# EAGLE board bt-lights (EAGLE 6.1)
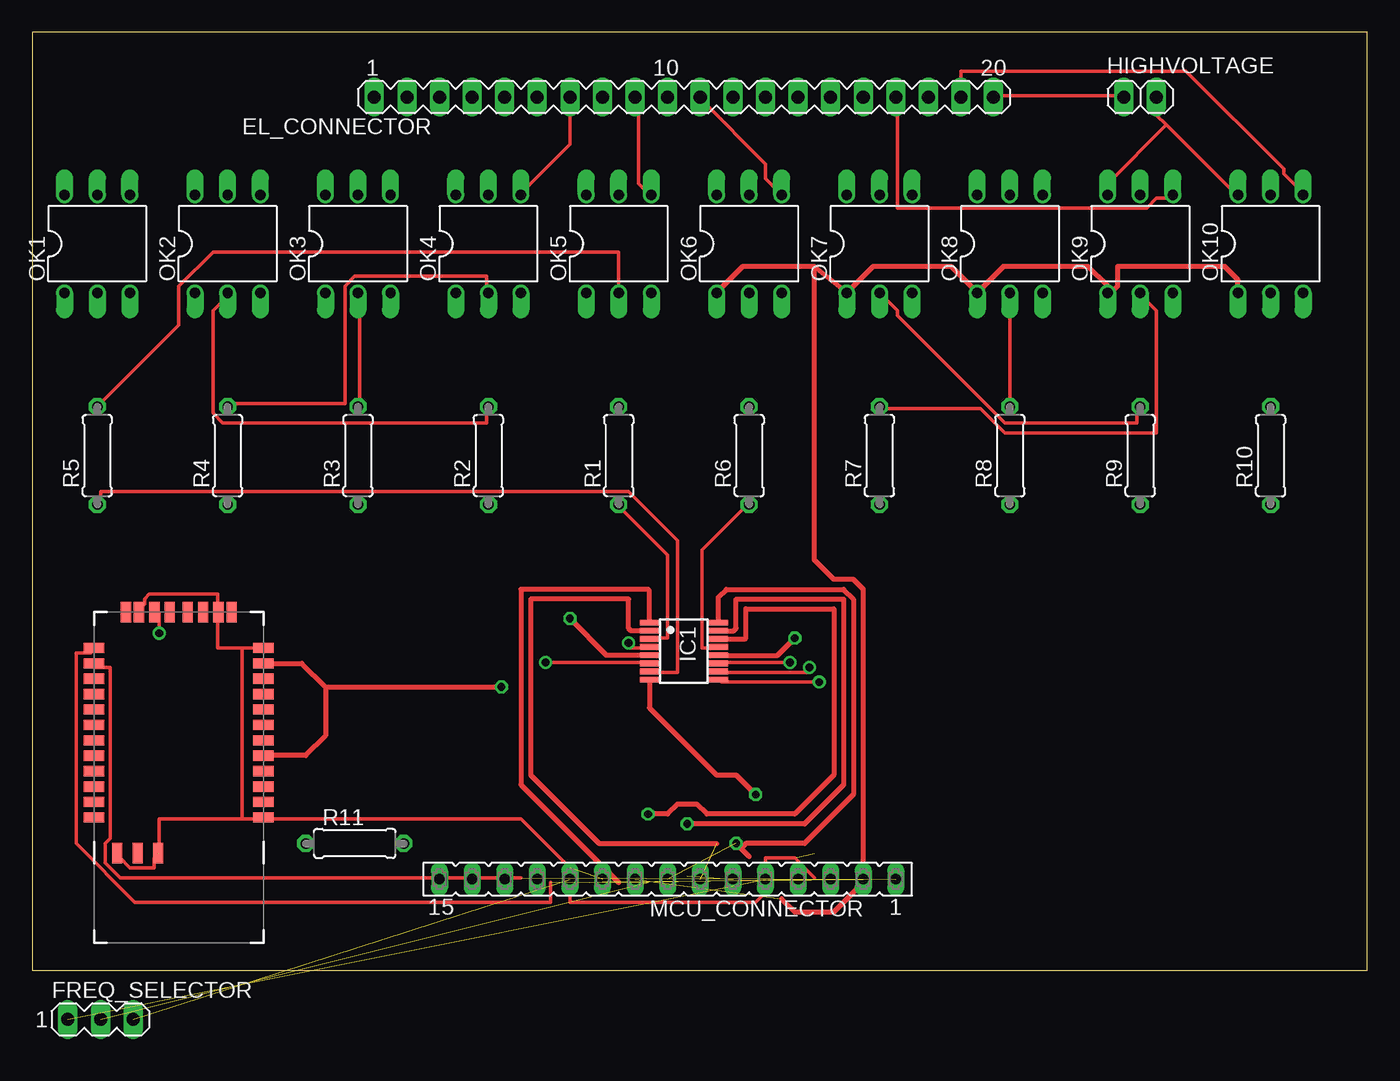
[diagram p0: board, top side]
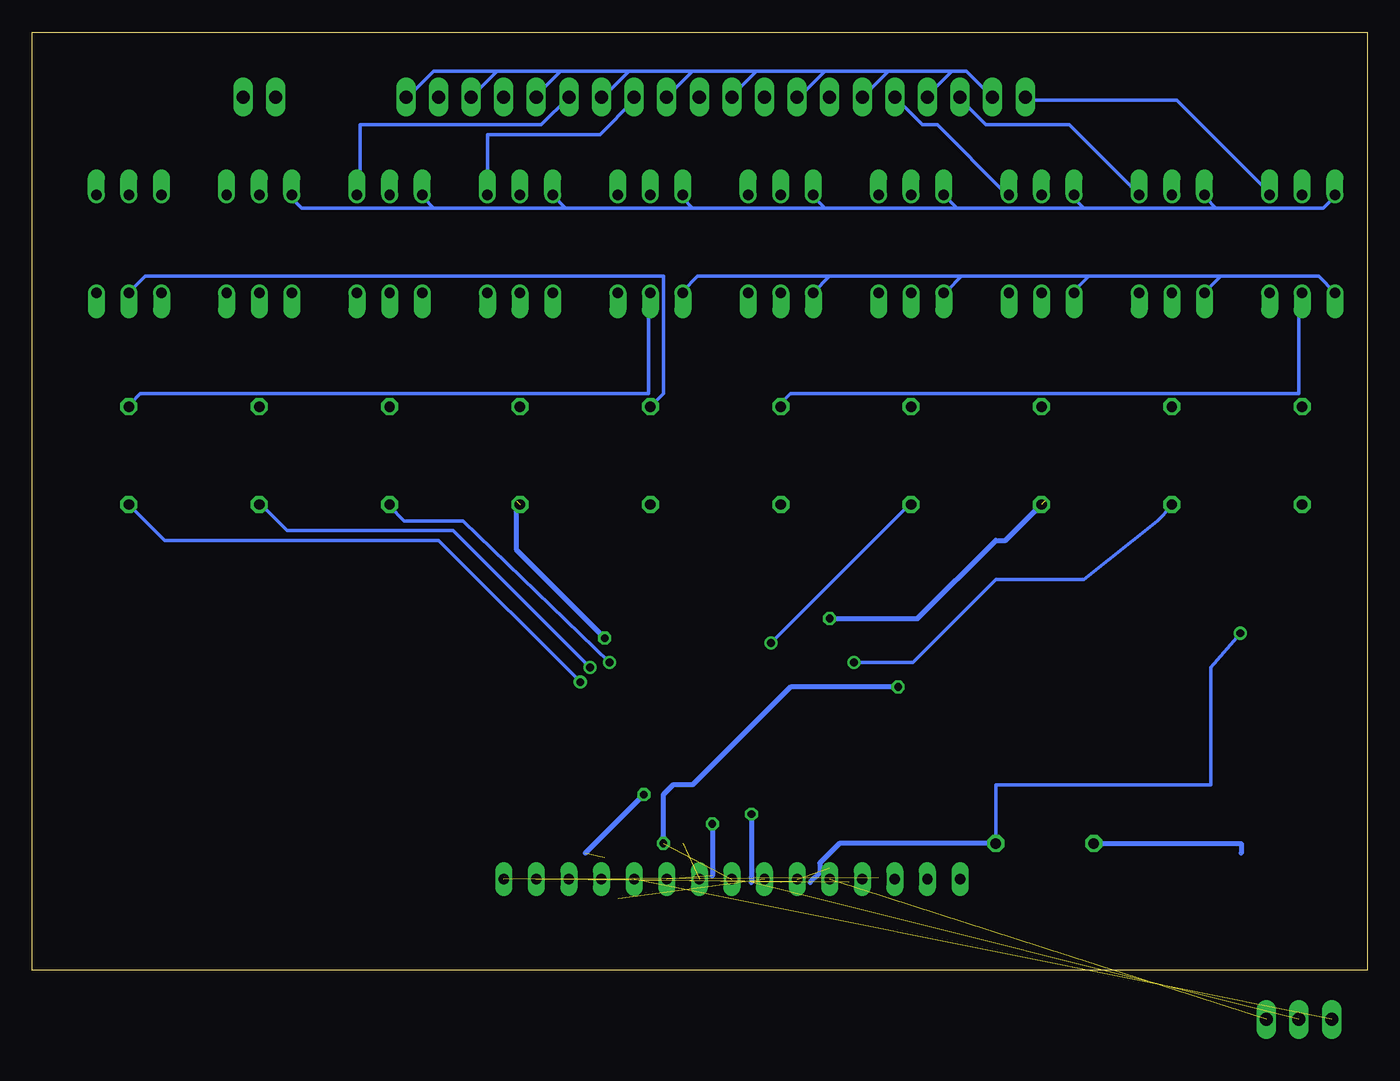
[diagram p1: board, bottom side, seen from below]

Size 104.06 x 73.14 mm. Coordinates in mm from the lower left corner, seen from the top.
Outline: 0,0 104.06,0 104.06,73.14 0,73.14 0,0
Copper layers (1*16): Top 0.035mm / dielectric 1.5mm / Bottom 0.035mm
Design rules: minimum track width 10mil, minimum drill 24mil, track to track 8mil, track to pad 8mil, pad to pad 8mil, via to via 8mil, smd to smd 8mil, copper to edge 40mil, drill to drill 8mil, minimum pad ring 10mil, minimum via ring 8mil, stop-mask expansion 4mil, vias tented up to drill 0mil, thermal gap 10mil

## Footprints (pad centres in the part's own frame; a part is rotated, then mirrored left to right if it is on the bottom)
RN41 = smd 0.8 x 1.6: 1 -6.6,-6.6; 2 -5.4,-6.6; 3 -4.2,-6.6; 4 -3,-6.6; 5 -1.8,-6.6; 6 -0.6,-6.6; 7 0.6,-6.6; 8 1.8,-6.6; 9 3,-6.6; 10 4.2,-6.6; 11 5.4,-6.6; 12 6.6,-6.6; 13 6.6,6.6; 14 5.4,6.6; 15 4.2,6.6; 16 3,6.6; 17 1.8,6.6; 18 0.6,6.6; 19 -0.6,6.6; 20 -1.8,6.6; 21 -3,6.6; 22 -4.2,6.6; 23 -5.4,6.6; 24 -6.6,6.6 | smd 1.6 x 0.8: 25 -9.4,4.8; 26 -9.4,3.2; 27 -9.4,1.6; 28 9.4,3.1; 29 9.4,-3.1; 30 9.4,-4.122; 31 9.4,-1.9; 32 9.4,-0.7; 33 9.4,0.7; 34 9.4,1.9; 35 9.4,4.122
MA20-1L = drill 1.016 long: 1 24.13,0; 2 21.59,0; 3 19.05,0; 4 16.51,0; 5 13.97,0; 6 11.43,0; 7 8.89,0; 8 6.35,0; 9 3.81,0; 10 1.27,0; 11 -1.27,0; 12 -3.81,0; 13 -6.35,0; 14 -8.89,0; 15 -11.43,0; 16 -13.97,0; 17 -16.51,0; 18 -19.05,0; 19 -21.59,0; 20 -24.13,0
MA03-1 = drill 1.016 long: 1 -2.54,0; 2 0,0; 3 2.54,0
1X02 = drill 1.016 long: 1 -1.27,0; 2 1.27,0
QSOP16 = smd 0.45 x 1.5: 1 -2.223,-2.69; 2 -1.587,-2.69; 3 -0.953,-2.69; 4 -0.318,-2.69; 5 0.318,-2.69; 6 0.953,-2.69; 7 1.587,-2.69; 8 2.223,-2.69; 9 2.223,2.69; 10 1.587,2.69; 11 0.953,2.69; 12 0.318,2.69; 13 -0.318,2.69; 14 -0.953,2.69; 15 -1.587,2.69; 16 -2.223,2.69
FE15 = drill 0.813 long: 1 -17.78,0; 2 -15.24,0; 3 -12.7,0; 4 -10.16,0; 5 -7.62,0; 6 -5.08,0; 7 -2.54,0; 8 0,0; 9 2.54,0; 10 5.08,0; 11 7.62,0; 12 10.16,0; 13 12.7,0; 14 15.24,0; 15 17.78,0
DIL06 = drill 0.813 offset: 1 -2.54,-3.81; 2 0,-3.81; 3 2.54,-3.81; 4 2.54,3.81; 5 0,3.81; 6 -2.54,3.81
0207/7 = drill 0.813 octagon: 1 -3.81,0; 2 3.81,0

## Placement (x,y rotation side)
BT_INTERFACE  BLUETOOTH-RN41"  [RN41]  11.43,18.54 90 top
EL_CONNECTOR  [MA20-1L]  50.8,68.07 180 top
FREQ_SELECTOR  [MA03-1]  5.33,-3.81 0 top  (outside the outline)
HIGHVOLTAGE  [1X02]  86.36,68.07 0 top
IC1  MAX6966  [QSOP16]  50.8,24.89 270 top
MCU_CONNECTOR  [FE15]  49.53,7.11 180 top
OK1  MOC3010M  [DIL06]  5.08,56.64 0 top
OK2  MOC3010M  [DIL06]  15.24,56.64 0 top
OK3  MOC3010M  [DIL06]  25.4,56.64 0 top
OK4  MOC3010M  [DIL06]  35.56,56.64 0 top
OK5  MOC3010M  [DIL06]  45.72,56.64 0 top
OK6  MOC3010M  [DIL06]  55.88,56.64 0 top
OK7  MOC3010M  [DIL06]  66.04,56.64 0 top
OK8  MOC3010M  [DIL06]  76.2,56.64 0 top
OK9  MOC3010M  [DIL06]  86.36,56.64 0 top
OK10  MOC3010M  [DIL06]  96.52,56.64 0 top
R1  1k  [0207/7]  45.72,40.13 90 top
R2  1k  [0207/7]  35.56,40.13 90 top
R3  1k  [0207/7]  25.4,40.13 90 top
R4  1k  [0207/7]  15.24,40.13 90 top
R5  1k  [0207/7]  5.08,40.13 90 top
R6  1k  [0207/7]  55.88,40.13 90 top
R7  1k  [0207/7]  66.04,40.13 90 top
R8  1k  [0207/7]  76.2,40.13 90 top
R9  1k  [0207/7]  86.36,40.13 90 top
R10  1k  [0207/7]  96.52,40.13 90 top
R11  10k  [0207/7]  25.15,9.91 0 top

## Library data of the parts
BT_INTERFACE = SparkFun-RF
EL_CONNECTOR FREQ_SELECTOR = con-lstb; OC_FARNELL: unknown; OC_NEWARK: unknown
HIGHVOLTAGE = pinhead
IC1 = max696x
MCU_CONNECTOR = con-lsta; OC_FARNELL: unknown; OC_NEWARK: unknown
OK1-OK10 = optocoupler; MF: FAIRCHILD SEMICONDUCTOR; MPN: MOC3010-M; OC_FARNELL: 1505423; OC_NEWARK: 72K8892
R1-R11 = resistor

## Nets
+3V3: BT_INTERFACE.5 BT_INTERFACE.11 IC1.16 MCU_CONNECTOR.8
+5V: MCU_CONNECTOR.9 OK1.1 OK2.1 OK3.1 OK4.1 OK5.1 OK6.1 OK7.1 OK8.1 OK9.1 OK10.1
AT: BT_INTERFACE.34 MCU_CONNECTOR.3 R11.2
GND: BT_INTERFACE.1 BT_INTERFACE.12 BT_INTERFACE.25 BT_INTERFACE.27 BT_INTERFACE.28 BT_INTERFACE.29 IC1.8 MCU_CONNECTOR.10 R11.1
N$1: IC1.2 MCU_CONNECTOR.7
N$2: IC1.1 MCU_CONNECTOR.4
N$3: IC1.15 MCU_CONNECTOR.6
N$4: FREQ_SELECTOR.1 MCU_CONNECTOR.5
N$5: OK1.2 R1.2
N$6: OK10.2 R6.2
N$7: OK9.2 R7.2
N$8: OK8.2 R8.2
N$9: OK7.2 R9.2
N$10: OK6.2 R10.2
N$11: OK2.2 R2.2
N$12: OK3.2 R3.2
N$13: OK4.2 R4.2
N$14: OK5.2 R5.2
N$15: FREQ_SELECTOR.3 MCU_CONNECTOR.11
N$16: FREQ_SELECTOR.2 IC1.14
N$P0: IC1.3 R1.1
N$P1: IC1.4 R2.1
N$P2: IC1.5 R3.1
N$P3: IC1.6 R4.1
N$P4: IC1.7 R5.1
N$P5: IC1.9 R10.1
N$P6: IC1.10 R9.1
N$P7: IC1.11 R8.1
N$P8: IC1.12 R7.1
N$P9: IC1.13 R6.1
OUT0: EL_CONNECTOR.1 OK1.4
OUT1: EL_CONNECTOR.3 OK2.4
OUT2: EL_CONNECTOR.5 OK3.4
OUT3: EL_CONNECTOR.7 OK4.4
OUT4: EL_CONNECTOR.9 OK5.4
OUT5: EL_CONNECTOR.11 OK6.4
OUT6: EL_CONNECTOR.13 OK7.4
OUT7: EL_CONNECTOR.15 OK8.4
OUT8: EL_CONNECTOR.17 OK9.4
OUT9: EL_CONNECTOR.19 OK10.4
RX: BT_INTERFACE.13 MCU_CONNECTOR.2
TX: BT_INTERFACE.14 MCU_CONNECTOR.1
VDD: EL_CONNECTOR.2 EL_CONNECTOR.4 EL_CONNECTOR.6 EL_CONNECTOR.8 EL_CONNECTOR.10 EL_CONNECTOR.12 EL_CONNECTOR.14 EL_CONNECTOR.16 EL_CONNECTOR.18 EL_CONNECTOR.20 HIGHVOLTAGE.1
VSS: HIGHVOLTAGE.2 OK1.6 OK2.6 OK3.6 OK4.6 OK5.6 OK6.6 OK7.6 OK8.6 OK9.6 OK10.6

## Tracks (layer width: path | path; a pad name or v marks a point on that pad's centre or on a via)
+3V3  (via drill 0.6)  (1 unrouted)
  Top 0.406: 55.88,8.89 55.24,9.53 | 55.24,9.53 v54.86,9.91 | BT_INTERFACE.11 21.02,23.94 22.86,22.1 | 22.86,22.1 22.86,18.29 21.34,16.76 18.05,16.76 BT_INTERFACE.5 | 22.86,22.1 v36.58,22.1 | IC1.16 53.49,29.11 54.1,29.72 63.25,29.72 64.01,28.96 64.01,13.72 60.2,9.91 55.63,9.91 55.24,9.53
  Bottom 0.406: v54.86,9.91 54.86,13.72 54.1,14.48 52.58,14.48 44.96,22.1 v36.58,22.1
+5V  (1 unrouted)
  Top 0.254: 83.82,52.58 OK9.1
  Top 0.406: 58.42,5.59 59.44,4.57 62.48,4.57 64.77,6.86 64.77,29.72 64.01,30.48 62.48,30.48 60.96,32 60.96,54.86 | 60.96,54.86 OK7.1 65.53,54.86 71.63,54.86 OK8.1 75.69,54.86 82.3,54.86 83.82,53.34 OK9.1 | OK10.1 93.98,53.85 92.96,54.86 84.58,54.86 84.58,53.34 83.82,52.58 | 60.96,54.86 55.37,54.86 OK6.1
  Bottom 0.254: OK1.1 3.81,54.1 11.43,54.1 | OK2.1 11.43,54.1 | 21.72,54.1 22.86,52.96 OK3.1 | 11.43,54.1 21.72,54.1 | 31.62,54.1 32.77,52.96 OK4.1 | 21.72,54.1 31.62,54.1 | 41.91,54.1 OK5.1 | 31.62,54.1 41.91,54.1 | 41.91,54.1 52.2,54.1 53.34,52.96 OK6.1
AT  (via drill 0.61)  (1 unrouted)
  Top 0.254: v9.91,26.29 9.91,27.81 BT_INTERFACE.34
  Bottom 0.254: R11.2 28.96,14.48 12.19,14.48 12.19,23.62 v9.91,26.29
  Bottom 0.406: R11.2 41.15,9.91 42.67,8.38 42.67,7.62 43.43,6.86
GND  (via drill 0.6)  (3 unrouted)
  Top 0.254: BT_INTERFACE.28 8.38,28.19 8.76,28.57 8.76,28.96 9.14,29.34 14.48,29.34 14.48,28.19 BT_INTERFACE.29 14.48,27.81 14.48,25.15 16.38,25.15 | 16.38,25.15 17.91,25.15 BT_INTERFACE.12 | BT_INTERFACE.25 6.86,8.76 7.62,8 9.53,8 9.53,8.76 BT_INTERFACE.27 9.91,9.14 9.91,11.81 16.38,11.81 | 16.38,11.81 17.91,11.81 BT_INTERFACE.1 18.29,11.81 38.1,11.81 41.91,8 41.91,5.33 56.39,5.33 57.15,6.1 57.15,8.76 59.44,8.76 60.96,7.24 | 16.38,11.81 16.38,25.15
  Top 0.406: IC1.8 48.11,20.47 53.34,15.24 54.86,15.24 v56.39,13.72
  Bottom 0.406: v56.39,13.72 60.96,9.14 | R11.1 9.83,9.91 BT_INTERFACE.27
N$1  (1 unrouted)
  Top 0.406: IC1.2 46.67,26.48 46.48,26.67 46.48,28.96 38.86,28.96 38.86,15.24 44.2,9.91 53.34,9.91
N$2  (1 unrouted)
  Top 0.406: IC1.1 48.11,29.61 48.01,29.72 38.1,29.72 38.1,14.48 45.72,6.86
N$3  (via drill 0.6)  (1 unrouted)
  Top 0.406: IC1.15 54.67,26.48 54.86,26.67 54.86,28.96 63.25,28.96 63.25,14.48 60.2,11.43 v51.05,11.43
  Bottom 0.406: v51.05,11.43 51.05,7.37
N$4  (1 unrouted)
N$5
  Bottom 0.254: OK1.2 5.33,52.58 5.33,44.96 44.96,44.96 45.72,44.2 R1.2
N$6
  Bottom 0.254: R6.2 54.86,44.96 54.86,54.1 95.25,54.1 OK10.2
N$7
  Top 0.254: R7.2 66.29,43.81 73.91,43.81 75.82,41.91 87.63,41.91 87.63,51.44 86.49,52.58 OK9.2
N$8
  Top 0.254: OK8.2 R8.2
N$9
  Top 0.254: OK7.2 67.44,51.44 67.44,51.05 75.82,42.67 86.11,42.67 86.11,43.81 R9.2
N$10
  Bottom 0.254: OK6.2 56.01,52.58 56.01,44.96 95.63,44.96 96.39,44.2 R10.2
N$11
  Top 0.254: OK2.2 15.24,52.58 14.1,51.44 14.1,43.43 14.86,42.67 35.43,42.67 35.43,43.81 R2.2
N$12
  Top 0.254: R3.2 25.53,44.2 25.53,52.58 OK3.2
N$13
  Top 0.254: R4.2 15.24,44.2 24.38,44.2 24.38,53.34 25.15,54.1 35.43,54.1 35.43,52.96 OK4.2
N$14
  Top 0.254: R5.2 11.43,50.29 11.43,53.34 14.1,56.01 45.72,56.01 OK5.2
N$15  (1 unrouted)
N$16  (via drill 0.6)  (1 unrouted)
  Top 0.406: IC1.14 55.56,25.84 55.63,25.91 55.63,28.19 62.48,28.19 62.48,15.24 59.44,12.19 52.58,12.19 51.82,12.95 50.29,12.95 49.53,12.19 v48.01,12.19
  Bottom 0.406: v48.01,12.19 48.01,7.24 48.01,6.86
N$P0
  Top 0.254: IC1.3 48.39,25.91 49.53,25.91 49.53,32.38 45.72,36.2 R1.1
N$P1  (via drill 0.61)
  Top 0.254: v46.48,25.53 46.48,25.15 48.01,25.15 IC1.4
  Bottom 0.254: v46.48,25.53 35.81,36.2 R2.1
N$P2  (via drill 0.6)  (1 unrouted)
  Top 0.406: IC1.5 44.77,24.57 v41.91,27.43
  Bottom 0.406: v41.91,27.43 35.05,27.43 28.96,33.53 28.19,33.53 25.15,36.58
N$P3  (via drill 0.61)
  Top 0.254: v40.01,24 48.01,24 IC1.6
  Bottom 0.254: v40.01,24 35.43,24 28.96,30.48 22.1,30.48 16.38,35.05 15.24,36.2 R4.1
N$P4
  Top 0.254: IC1.7 48.39,23.24 50.29,23.24 50.29,33.53 46.48,37.34 5.33,37.34 5.33,36.58 R5.1
N$P5  (via drill 0.61)
  Top 0.254: v61.34,22.48 53.72,22.48 IC1.9
  Bottom 0.254: v61.34,22.48 72.39,33.53 93.73,33.53 R10.1
N$P6  (via drill 0.61)
  Top 0.254: v60.58,23.62 60.58,23.24 53.72,23.24 IC1.10
  Bottom 0.254: v60.58,23.62 71.25,34.29 84.2,34.29 86.11,36.2 R9.1
N$P7  (via drill 0.61)
  Top 0.254: v59.05,24 53.72,24 IC1.11
  Bottom 0.254: v59.05,24 70.48,35.05 75.06,35.05 76.2,36.2 R8.1
N$P8  (via drill 0.6)  (1 unrouted)
  Top 0.406: IC1.12 58.1,24.57 v59.44,25.91
  Bottom 0.406: v59.44,25.91 66.29,32.77 66.29,36.58
N$P9
  Top 0.254: IC1.13 53.34,25.15 52.2,25.15 52.2,32.77 55.63,36.2 R6.1
OUT0
  Bottom 0.254: OK1.4 7.62,60.58 14.86,67.82 26.67,67.82 EL_CONNECTOR.1
OUT1
  Bottom 0.254: OK2.4 23.24,65.91 29.72,65.91 31.62,67.82 EL_CONNECTOR.3
OUT2
  Bottom 0.254: EL_CONNECTOR.5 34.67,65.91 33.53,65.91 28.19,60.58 OK3.4
OUT3
  Top 0.254: EL_CONNECTOR.7 41.91,64.39 38.1,60.58 OK4.4
OUT4
  Top 0.254: OK5.4 48.01,60.58 47.24,61.34 47.24,67.82 EL_CONNECTOR.9
OUT5
  Top 0.254: OK6.4 57.15,61.72 57.15,62.87 52.2,67.82 EL_CONNECTOR.11
OUT6
  Bottom 0.254: OK7.4 68.58,65.15 59.82,65.15 57.15,67.82 EL_CONNECTOR.13
OUT7
  Bottom 0.254: EL_CONNECTOR.15 64.39,65.91 78.49,65.91 78.49,60.58 OK8.4
OUT8
  Top 0.254: OK9.4 88.77,60.2 87.63,60.2 86.87,59.44 67.44,59.44 67.44,67.82 EL_CONNECTOR.17
OUT9
  Top 0.254: EL_CONNECTOR.19 72.39,70.1 89.92,70.1 97.54,62.48 97.54,62.1 99.06,60.58 OK10.4
RX  (1 unrouted)
  Top 0.254: 40.39,6.86 40.39,5.33 8,5.33 3.43,9.91 3.43,24.77 4.57,24.77 BT_INTERFACE.13
TX  (1 unrouted)
  Top 0.254: 38.1,7.24 6.86,7.24 5.71,8.38 5.71,9.91 6.1,10.29 6.1,23.62 4.95,23.62 BT_INTERFACE.14
VDD
  Top 0.254: HIGHVOLTAGE.1 84.96,68.2 75.06,68.2 EL_CONNECTOR.20
  Bottom 0.254: EL_CONNECTOR.2 31.24,70.1 32.38,70.1 | 32.38,70.1 34.29,68.2 EL_CONNECTOR.4 | 37.34,70.1 EL_CONNECTOR.6 | 32.38,70.1 37.34,70.1 | 42.29,70.1 44.2,68.2 EL_CONNECTOR.8 | 37.34,70.1 42.29,70.1 | 47.62,70.1 49.53,68.2 EL_CONNECTOR.10 | 42.29,70.1 47.62,70.1 | 52.58,70.1 EL_CONNECTOR.12 | 47.62,70.1 52.58,70.1 | 57.53,70.1 59.44,68.2 EL_CONNECTOR.14 | 52.58,70.1 57.53,70.1 | 62.87,70.1 64.77,68.2 EL_CONNECTOR.16 | 57.53,70.1 62.87,70.1 | 67.82,70.1 EL_CONNECTOR.18 | 62.87,70.1 67.82,70.1 | 67.82,70.1 72.77,70.1 74.68,68.2 EL_CONNECTOR.20
VSS
  Top 0.254: 88.39,65.91 87.63,66.67 HIGHVOLTAGE.2 | 88.39,65.91 93.73,60.58 OK10.6 | 88.39,65.91 83.82,61.34 OK9.6
  Bottom 0.254: 11.81,59.44 3.43,59.44 2.67,60.2 OK1.6 | 11.81,59.44 12.57,60.2 OK2.6 | 22.1,59.44 22.86,60.2 OK3.6 | 11.81,59.44 22.1,59.44 | 32,59.44 OK4.6 | 22.1,59.44 32,59.44 | 42.29,59.44 43.05,60.2 OK5.6 | 32,59.44 42.29,59.44 | 52.58,59.44 53.34,60.2 OK6.6 | 42.29,59.44 52.58,59.44 | 62.48,59.44 OK7.6 | 52.58,59.44 62.48,59.44 | 72.77,59.44 73.53,60.2 OK8.6 | 62.48,59.44 72.77,59.44 | 72.77,59.44 83.06,59.44 83.82,60.2 OK9.6